# EAGLE board menzuke (EAGLE 8.6.0), part 1 of 2
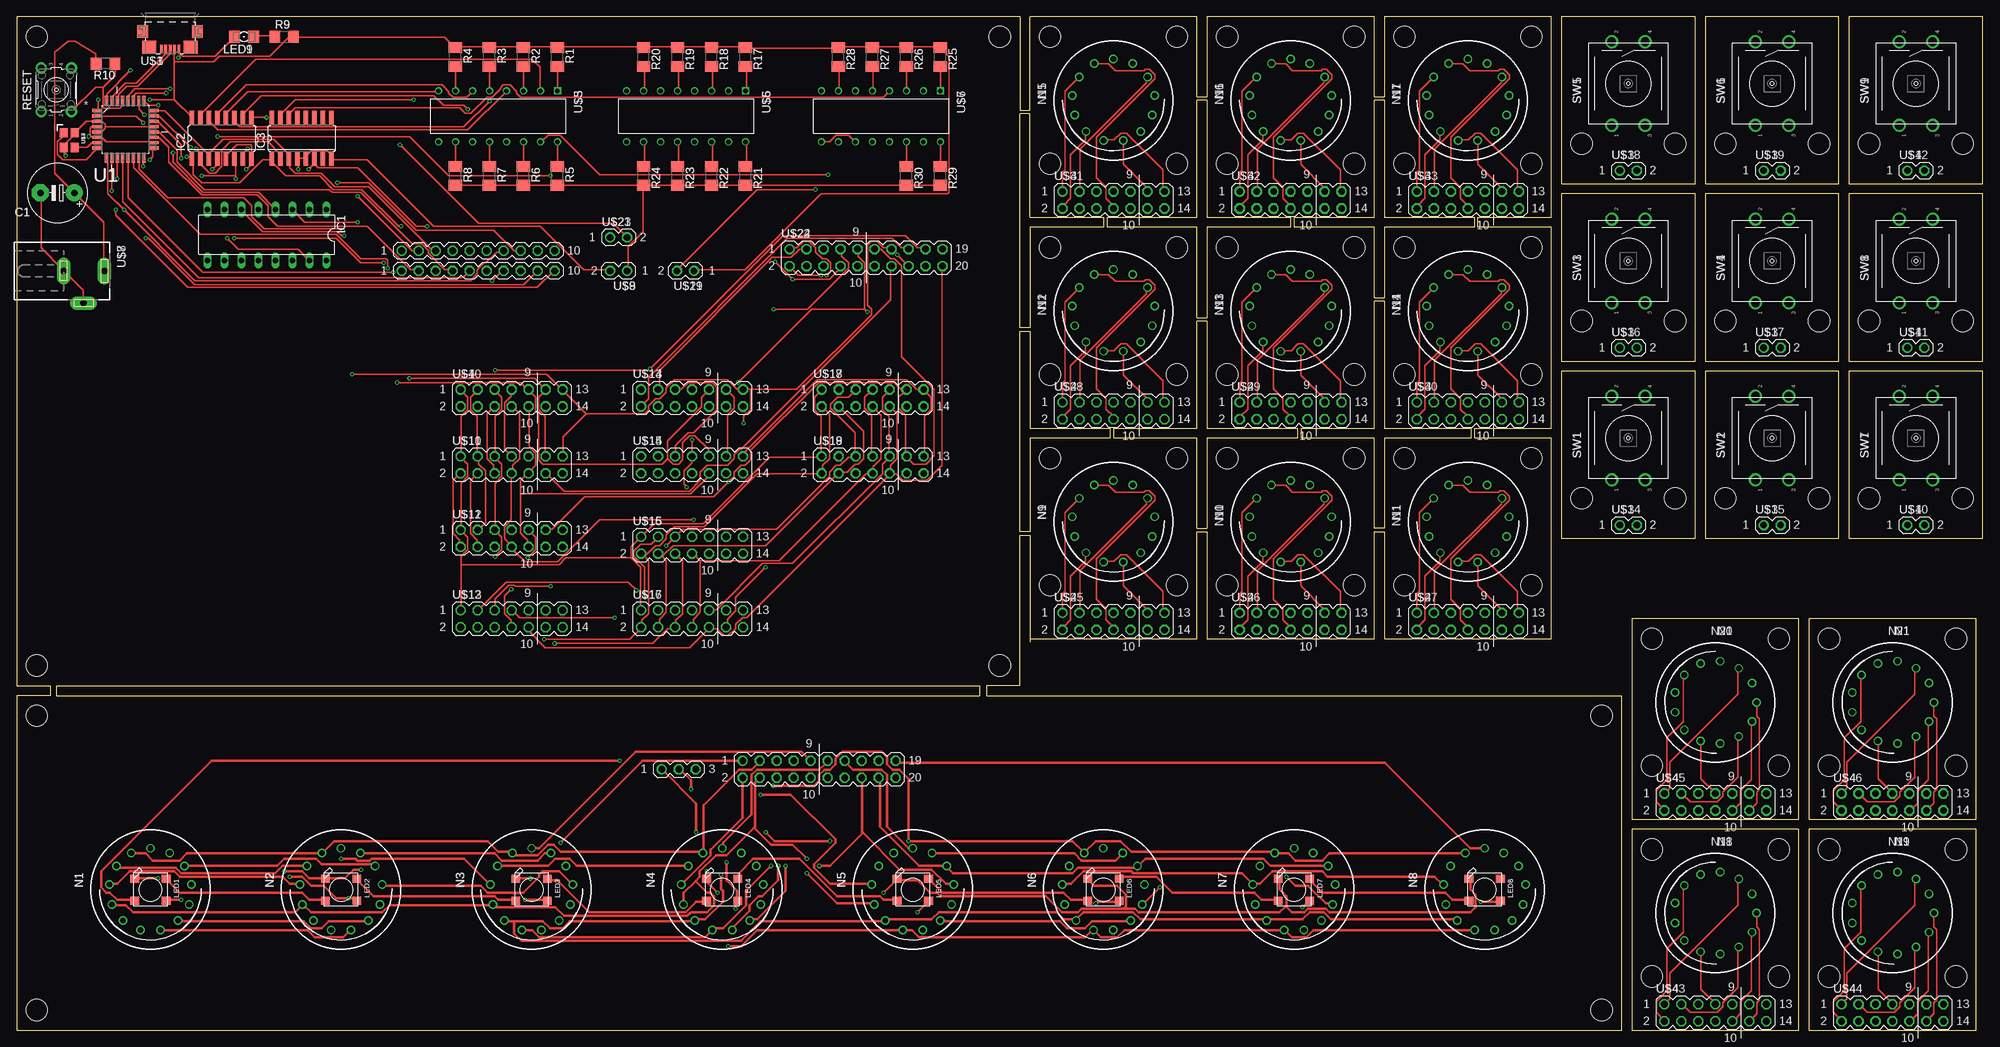
[diagram p0: board, top side]
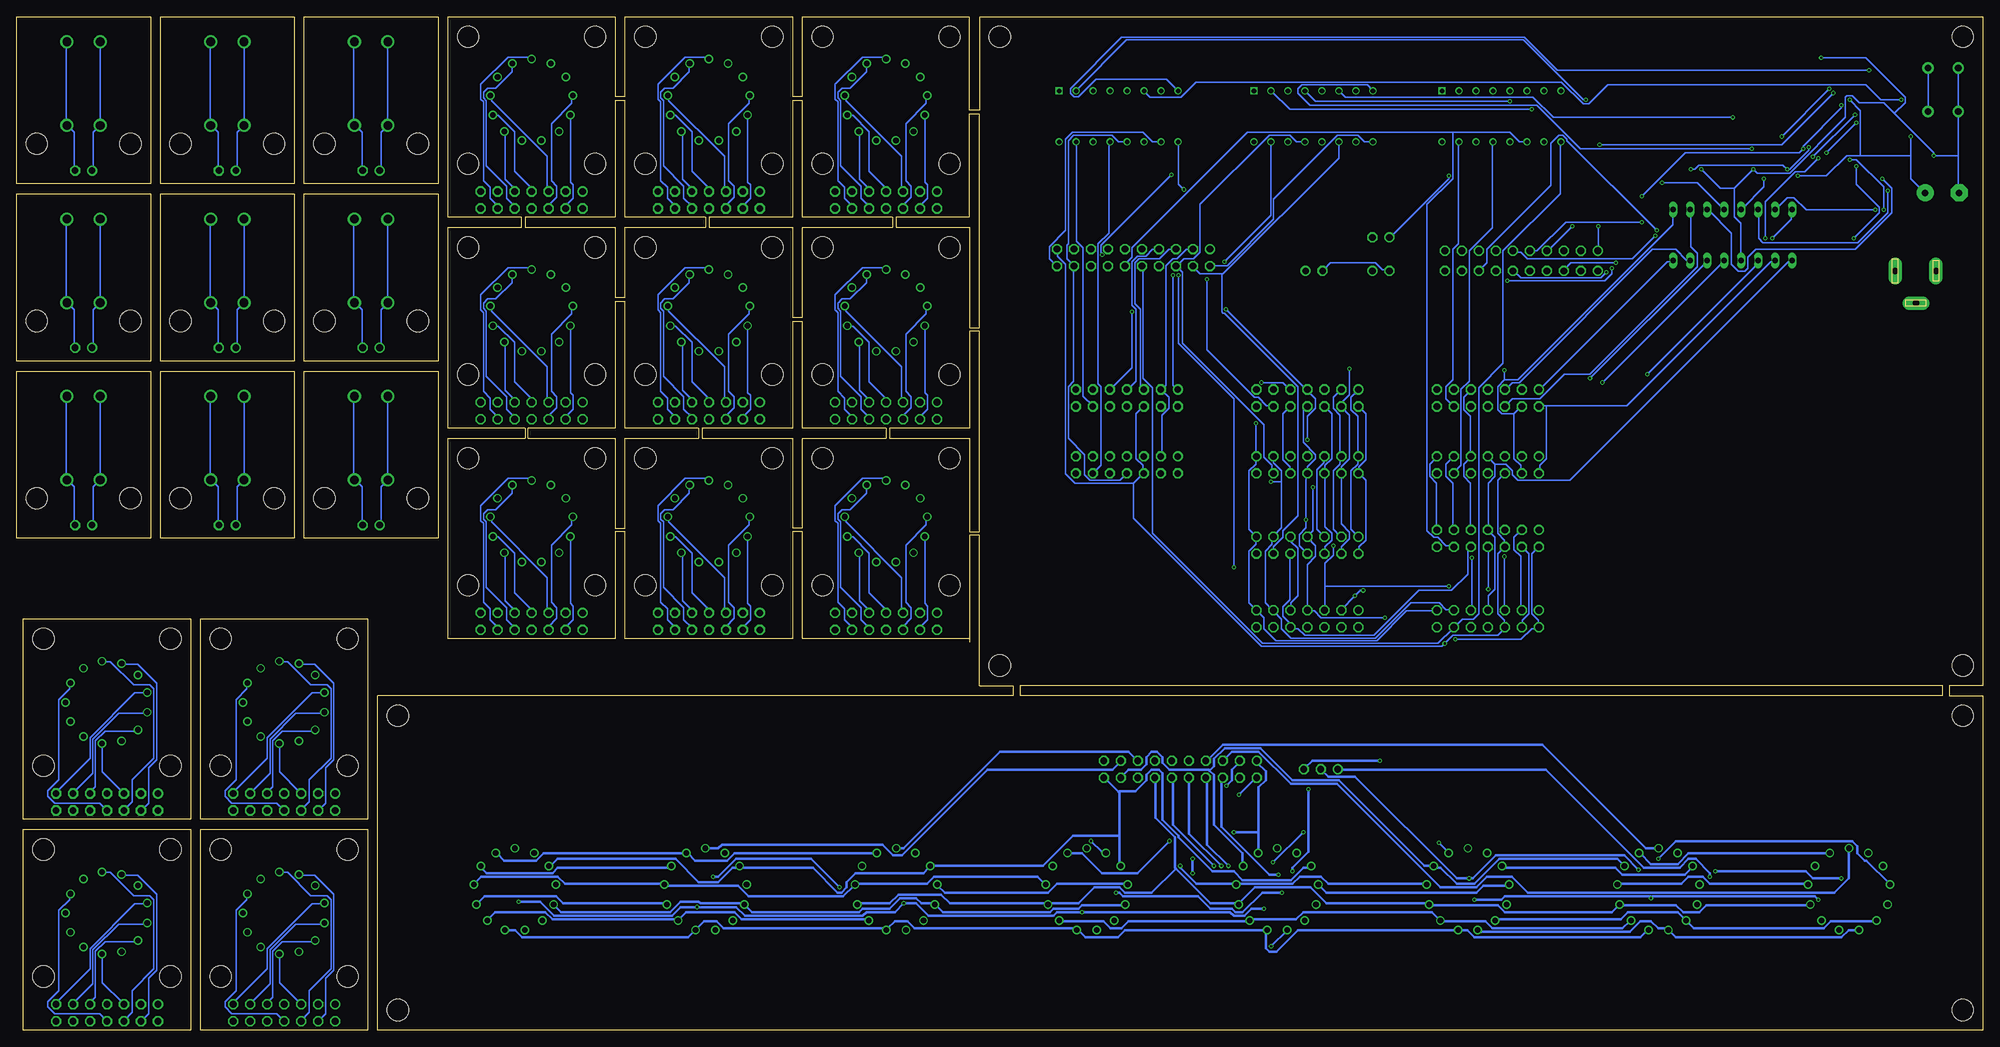
[diagram p1: board, bottom side, seen from below]

Size 294 x 151.5 mm. Coordinates in mm from the lower left corner, seen from the top.
Outline: 151.5,58.5 176.5,58.5 176.5,74.5 178,74.5 178,58.5 203,58.5 203,74.5 204.5,74.5 204.5,58.5 229.5,58.5 229.5,88.5 218,88.5 218,90 229.5,90 229.5,120 218.5,120 218.5,121.5 229.5,121.5 229.5,151.5 204.5,151.5 204.5,139.5 203,139.5 203,151.5 178,151.5 178,139.5 176.5,139.5 176.5,151.5 151.5,151.5 151.5,137.5 150,137.5 150,151.5 0,151.5 0,51.5 5,51.5 5,50 0,50 0,0 240,0 240,50 145,50 145,51.5 150,51.5 150,74 151.5,74 151.5,58
Outline: 176.5,75 176.5,88.5 164,88.5 164,90 176.5,90 176.5,106 178,106 178,90 191.5,90 191.5,88.5 178,88.5 178,75 176.5,75
Outline: 163.5,88.5 151.5,88.5 151.5,74.5 150,74.5 150,104.5 151.5,104.5 151.5,90 163.5,90 163.5,88.5
Outline: 203,75 203,88.5 192,88.5 192,90 203,90 203,109 204.5,109 204.5,90 217.5,90 217.5,88.5 204.5,88.5 204.5,75 203,75
Outline: 176.5,106.5 176.5,120 163,120 163,121.5 176.5,121.5 176.5,139 178,139 178,121.5 190.5,121.5 190.5,120 178,120 178,106.5 176.5,106.5
Outline: 162.5,120 151.5,120 151.5,105 150,105 150,137 151.5,137 151.5,121.5 162.5,121.5 162.5,120
Outline: 203,109.5 203,120 191,120 191,121.5 203,121.5 203,139 204.5,139 204.5,121.5 218,121.5 218,120 204.5,120 204.5,109.5 203,109.5
Outline: 231,73.5 251,73.5 251,98.5 231,98.5 231,73.5
Outline: 252.5,73.5 272.5,73.5 272.5,98.5 252.5,98.5 252.5,73.5
Outline: 231,100 251,100 251,125 231,125 231,100
Outline: 252.5,100 272.5,100 272.5,125 252.5,125 252.5,100
Outline: 231,126.5 251,126.5 251,151.5 231,151.5 231,126.5
Outline: 252.5,126.5 272.5,126.5 272.5,151.5 252.5,151.5 252.5,126.5
Outline: 274,73.5 294,73.5 294,98.5 274,98.5 274,73.5
Outline: 274,100 294,100 294,125 274,125 274,100
Outline: 274,126.5 294,126.5 294,151.5 274,151.5 274,126.5
Outline: 241.5,0 266.5,0 266.5,30 241.5,30 241.5,0
Outline: 268,0 293,0 293,30 268,30 268,0
Outline: 241.5,31.5 266.5,31.5 266.5,61.5 241.5,61.5 241.5,31.5
Outline: 268,31.5 293,31.5 293,61.5 268,61.5 268,31.5
Outline: 6,50 144,50 144,51.5 6,51.5 6,50
Copper layers (1*16): Top 0.035mm / dielectric 1.6mm / Bottom 0.035mm
Design rules "Elecrow_2-layer_PCB_eagle_rule": minimum track width 6mil, minimum drill 12mil, track to track 6mil, track to pad 8mil, pad to pad 12mil, via to via 12mil, smd to smd 0mil, copper to edge 20mil, drill to drill 10mil, minimum pad ring 6mil, minimum via ring 6mil, stop-mask expansion 0mil, vias tented up to drill 100mil, thermal gap 10mil
Net classes: 0 default: width 0.254 mm
Holes 3.2 mm at 3,47 3,3 237,47 237,3 154.5,85.5 173.5,85.5 173.5,66.5 154.5,66.5 181,85.5 200,85.5 200,66.5 181,66.5 207.5,85.5 226.5,85.5 226.5,66.5 207.5,66.5 154.5,117 173.5,117 173.5,98 154.5,98 181,117 200,117 200,98 181,98 207.5,117 226.5,117 226.5,98 207.5,98 154.5,148.5 173.5,148.5 173.5,129.5 154.5,129.5 181,148.5 200,148.5 200,129.5 181,129.5 207.5,148.5 226.5,148.5 226.5,129.5 207.5,129.5 248,79.5 234,79.5 269.5,79.5 255.5,79.5 248,106 234,106 269.5,106 255.5,106 248,132.5 234,132.5 269.5,132.5 255.5,132.5 291,79.5 277,79.5 291,106 277,106 291,132.5 277,132.5 244.5,27 263.5,27 263.5,8 244.5,8 271,27 290,27 290,8 271,8 244.5,58.5 263.5,58.5 263.5,39.5 244.5,39.5 271,58.5 290,58.5 290,39.5 271,39.5 147,148.5 147,54.5 3,54.5 3,148.5

## Footprints (pad centres in the part's own frame; a part is rotated, then mirrored left to right if it is on the bottom)
E5-8,5 = drill 1.016 pad 2.54: + -2.54,0 | drill 1.016 pad 2.54 octagon: - 2.54,0
DIL16 = drill 0.813 long: 1 -8.89,-3.81; 2 -6.35,-3.81; 3 -3.81,-3.81; 4 -1.27,-3.81; 5 1.27,-3.81; 6 3.81,-3.81; 7 6.35,-3.81; 8 8.89,-3.81; 9 8.89,3.81; 10 6.35,3.81; 11 3.81,3.81; 12 1.27,3.81; 13 -1.27,3.81; 14 -3.81,3.81; 15 -6.35,3.81; 16 -8.89,3.81
SO16 = smd 0.66 x 2.032: 1 -4.445,-3.073; 2 -3.175,-3.073; 3 -1.905,-3.073; 4 -0.635,-3.073; 5 0.635,-3.073; 6 1.905,-3.073; 7 3.175,-3.073; 8 4.445,-3.073; 9 4.445,3.073; 10 3.175,3.073; 11 1.905,3.073; 12 0.635,3.073; 13 -0.635,3.073; 14 -1.905,3.073; 15 -3.175,3.073; 16 -4.445,3.073
WS2812B-NARROW = smd 1.3 x 1.2: 1-VDD 2.35,-1.65; 2-DOUT 2.35,1.65; 3-GND -2.35,1.65; 4-DIN -2.35,-1.65
1206 = smd 1.6 x 1.803: A -1.422,0; C 1.422,0
IN-14 = drill 0.84: 0 5.094,-3.516; 1 -5.094,-3.516; 2 -6.145,-0.746; 3 -5.788,2.195; 4 -4.105,4.633; 5 -1.481,6.01; 6 1.481,6.01; 7 4.105,4.633; 8 5.788,2.195; 9 6.145,-0.746; A 0,-6.19; LHDP 2.877,-5.481; RHDP -2.877,-5.481
M3216 = smd 1.6 x 2: 1 -1.4,0; 2 1.4,0
R3216 = smd 1.6 x 1.8: 1 -1.4,0; 2 1.4,0
DTS6 = drill 1.016 pad 1.676: 1 -3.251,2.261; 2 3.251,2.261; 3 -3.251,-2.261; 4 3.251,-2.261
TVGP01-G73BB = drill 1.3: 1 -6.25,2.5; 2 6.25,2.5; 3 -6.25,-2.5; 4 6.25,-2.5
QFP80P900X900X120-32N = smd 1.473 x 0.508: 1 -4.242,2.794; 2 -4.242,2.007; 3 -4.242,1.194; 4 -4.242,0.406; 5 -4.242,-0.406; 6 -4.242,-1.194; 7 -4.242,-2.007; 8 -4.242,-2.794; 17 4.242,-2.794; 18 4.242,-2.007; 19 4.242,-1.194; 20 4.242,-0.406; 21 4.242,0.406; 22 4.242,1.194; 23 4.242,2.007; 24 4.242,2.794 | smd 0.508 x 1.473: 9 -2.794,-4.242; 10 -2.007,-4.242; 11 -1.194,-4.242; 12 -0.406,-4.242; 13 0.406,-4.242; 14 1.194,-4.242; 15 2.007,-4.242; 16 2.794,-4.242; 25 2.794,4.242; 26 2.007,4.242; 27 1.194,4.242; 28 0.406,4.242; 29 -0.406,4.242; 30 -1.194,4.242; 31 -2.007,4.242; 32 -2.794,4.242
PIN_HEADER_MALE_2X10_20P = drill 1: P$1 -11.43,1.27 | drill 1 octagon: P$2 -11.43,-1.27; P$3 -8.89,1.27; P$4 -8.89,-1.27; P$5 -6.35,1.27; P$6 -6.35,-1.27; P$7 -3.81,1.27; P$8 -3.81,-1.27; P$9 -1.27,1.27; P$10 -1.27,-1.27; P$11 1.27,1.27; P$12 1.27,-1.27; P$13 3.81,1.27; P$14 3.81,-1.27; P$15 6.35,1.27; P$16 6.35,-1.27; P$17 8.89,1.27; P$18 8.89,-1.27; P$19 11.43,1.27; P$20 11.43,-1.27
PIN_HEADER_MALE_1X03_03P = drill 1: P$1 -2.54,0 | drill 1 octagon: P$2 0,0; P$3 2.54,0
ZX62R-B-5P = smd 1.35 x 0.4: 1 2.675,-1.3; 2 2.675,-0.65; 3 2.675,0; 4 2.675,0.65; 5 2.675,1.3 | smd 1.9 x 1.6: M1 0,-4.1; M2 0,4.1 | smd 2 x 2.1: M3 2.35,3.1; M4 2.35,-3.1
FA-238 = smd 1.4 x 1.2: 1 0,-1.6; 2 2.2,-1.6; 3 2.2,0; 4 0,0
TLP627-4 = drill 0.7 square: P$1 0,0 | drill 0.7: P$2 0,-2.54; P$3 0,-5.08; P$4 0,-7.62; P$5 0,-10.16; P$6 0,-12.7; P$7 0,-15.24; P$8 0,-17.78; P$9 7.62,-17.78; P$10 7.62,-15.24; P$11 7.62,-12.7; P$12 7.62,-10.16; P$13 7.62,-7.62; P$14 7.62,-5.08; P$15 7.62,-2.54; P$16 7.62,0
DC_JACK_2DC0005D100 = drill 1 pad 2 long: 1 -3.1,0; 2 3,0; 3 0,4.8
PIN_HEADER_MALE_1X02_02P = drill 1: P$1 -1.27,0 | drill 1 octagon: P$2 1.27,0
PIN_HEADER_MALE_2X07_14P = drill 1: P$1 -7.62,1.27 | drill 1 octagon: P$2 -7.62,-1.27; P$3 -5.08,1.27; P$4 -5.08,-1.27; P$5 -2.54,1.27; P$6 -2.54,-1.27; P$7 0,1.27; P$8 0,-1.27; P$9 2.54,1.27; P$10 2.54,-1.27; P$11 5.08,1.27; P$12 5.08,-1.27; P$13 7.62,1.27; P$14 7.62,-1.27
PIN_HEADER_MALE_1X10_10P = drill 1: P$1 -11.43,0 | drill 1 octagon: P$2 -8.89,0; P$3 -6.35,0; P$4 -3.81,0; P$5 -1.27,0; P$6 1.27,0; P$7 3.81,0; P$8 6.35,0; P$9 8.89,0; P$10 11.43,0

## Placement (x,y rotation side)
C1  [E5-8,5]  6.09,125.15 180 top
IC1  74141N  [DIL16]  37.4,118.89 180 top
IC2  74HC138D  [SO16]  30.67,133.32 0 top
IC3  74HC138D  [SO16]  42.64,133.32 0 top
LED1  WS2812B_5050N  [WS2812B-NARROW]  20,21 0 top
LED2  WS2812B_5050N  [WS2812B-NARROW]  48.5,21 0 top
LED3  WS2812B_5050N  [WS2812B-NARROW]  77,21 0 top
LED4  WS2812B_5050N  [WS2812B-NARROW]  105.5,21 0 top
LED5  WS2812B_5050N  [WS2812B-NARROW]  134,21 0 top
LED6  WS2812B_5050N  [WS2812B-NARROW]  162.5,21 0 top
LED7  WS2812B_5050N  [WS2812B-NARROW]  191,21 0 top
LED8  WS2812B_5050N  [WS2812B-NARROW]  219.5,21 0 top
LED9  [1206]  34,148.5 180 top
N1  IN-14  [IN-14]  20,21 180 top
N2  IN-14  [IN-14]  48.5,21 180 top
N3  IN-14  [IN-14]  77,21 180 top
N4  IN-14  [IN-14]  105.5,21 180 top
N5  IN-14  [IN-14]  134,21 180 top
N6  IN-14  [IN-14]  162.5,21 180 top
N7  IN-14  [IN-14]  191,21 180 top
N8  IN-14  [IN-14]  219.5,21 180 top
N9  IN-14  [IN-14]  164,76 180 top
N10  IN-14  [IN-14]  190.5,76 180 top
N11  IN-14  [IN-14]  217,76 180 top
N12  IN-14  [IN-14]  164,107.5 180 top
N13  IN-14  [IN-14]  190.5,107.5 180 top
N14  IN-14  [IN-14]  217,107.5 180 top
N15  IN-14  [IN-14]  164,139 180 top
N16  IN-14  [IN-14]  190.5,139 180 top
N17  IN-14  [IN-14]  217,139 180 top
N18  IN-14  [IN-14]  254,17.5 90 top
N19  IN-14  [IN-14]  280.5,17.5 90 top
N20  IN-14  [IN-14]  254,49 90 top
N21  IN-14  [IN-14]  280.5,49 90 top
R1  [M3216]  80.85,145.48 270 top
R2  [M3216]  75.77,145.48 270 top
R3  [M3216]  70.69,145.48 270 top
R4  [M3216]  65.61,145.48 270 top
R5  [M3216]  80.85,127.7 270 top
R6  [M3216]  75.77,127.7 270 top
R7  [M3216]  70.69,127.7 270 top
R8  [M3216]  65.61,127.7 270 top
R9  [R3216]  40,148.5 0 top
R10  [R3216]  13.3,144.49 180 top
R17  [M3216]  108.98,145.48 270 top
R18  [M3216]  103.9,145.48 270 top
R19  [M3216]  98.82,145.48 270 top
R20  [M3216]  93.74,145.48 270 top
R21  [M3216]  108.98,127.7 270 top
R22  [M3216]  103.9,127.7 270 top
R23  [M3216]  98.82,127.7 270 top
R24  [M3216]  93.74,127.7 270 top
R25  [M3216]  138.11,145.48 270 top
R26  [M3216]  133.03,145.48 270 top
R27  [M3216]  127.95,145.48 270 top
R28  [M3216]  122.87,145.48 270 top
R29  [M3216]  138.11,127.7 270 top
R30  [M3216]  133.03,127.7 270 top
RESET  DTS-6  [DTS6]  5.92,140.59 90 top
SW1  TVGP01-G73BB  [TVGP01-G73BB]  241,88.5 90 top
SW2  TVGP01-G73BB  [TVGP01-G73BB]  262.5,88.5 90 top
SW3  TVGP01-G73BB  [TVGP01-G73BB]  241,115 90 top
SW4  TVGP01-G73BB  [TVGP01-G73BB]  262.5,115 90 top
SW5  TVGP01-G73BB  [TVGP01-G73BB]  241,141.5 90 top
SW6  TVGP01-G73BB  [TVGP01-G73BB]  262.5,141.5 90 top
SW7  TVGP01-G73BB  [TVGP01-G73BB]  284,88.5 90 top
SW8  TVGP01-G73BB  [TVGP01-G73BB]  284,115 90 top
SW9  TVGP01-G73BB  [TVGP01-G73BB]  284,141.5 90 top
U1  ATMEGA328P-AU  [QFP80P900X900X120-32N]  16.24,134.67 0 top
U$1  PIN_HEADER_MALE_2X10_20P  [PIN_HEADER_MALE_2X10_20P]  120,39 0 top
U$2  PIN_HEADER_MALE_1X03_03P  [PIN_HEADER_MALE_1X03_03P]  99,39 0 top
U$3  MICRO-USB-ZX62R-B-5P  [ZX62R-B-5P]  22.94,149.29 270 top
U$4  FA-238  [FA-238]  8.65,134.16 270 top
U$5  TLP627-4  [TLP627-4]  80.85,140.4 270 top
U$6  TLP627-4  [TLP627-4]  108.98,140.4 270 top
U$7  TLP627-4  [TLP627-4]  138.11,140.4 270 top
U$8  DC_JACK_2DC0005D100  [DC_JACK_2DC0005D100]  10,113.5 180 top
U$9  PIN_HEADER_MALE_1X02_02P  [PIN_HEADER_MALE_1X02_02P]  90,113.5 180 top
U$10  PIN_HEADER_MALE_2X07_14P  [PIN_HEADER_MALE_2X07_14P]  74,94.5 0 top
U$11  PIN_HEADER_MALE_2X07_14P  [PIN_HEADER_MALE_2X07_14P]  74,84.5 0 top
U$12  PIN_HEADER_MALE_2X07_14P  [PIN_HEADER_MALE_2X07_14P]  74,73.5 0 top
U$13  PIN_HEADER_MALE_2X07_14P  [PIN_HEADER_MALE_2X07_14P]  74,61.5 0 top
U$14  PIN_HEADER_MALE_2X07_14P  [PIN_HEADER_MALE_2X07_14P]  101,94.5 0 top
U$15  PIN_HEADER_MALE_2X07_14P  [PIN_HEADER_MALE_2X07_14P]  101,84.5 0 top
U$16  PIN_HEADER_MALE_2X07_14P  [PIN_HEADER_MALE_2X07_14P]  101,72.5 0 top
U$17  PIN_HEADER_MALE_2X07_14P  [PIN_HEADER_MALE_2X07_14P]  101,61.5 0 top
U$18  PIN_HEADER_MALE_2X07_14P  [PIN_HEADER_MALE_2X07_14P]  128,94.5 0 top
U$19  PIN_HEADER_MALE_2X07_14P  [PIN_HEADER_MALE_2X07_14P]  128,84.5 0 top
U$20  PIN_HEADER_MALE_1X10_10P  [PIN_HEADER_MALE_1X10_10P]  69,116.5 0 top
U$21  PIN_HEADER_MALE_1X02_02P  [PIN_HEADER_MALE_1X02_02P]  100,113.5 180 top
U$22  PIN_HEADER_MALE_1X10_10P  [PIN_HEADER_MALE_1X10_10P]  69,113.5 0 top
U$23  PIN_HEADER_MALE_1X02_02P  [PIN_HEADER_MALE_1X02_02P]  90,118.5 0 top
U$24  PIN_HEADER_MALE_2X10_20P  [PIN_HEADER_MALE_2X10_20P]  127,115.5 0 top
U$25  PIN_HEADER_MALE_2X07_14P  [PIN_HEADER_MALE_2X07_14P]  164,61.1 0 top
U$26  PIN_HEADER_MALE_2X07_14P  [PIN_HEADER_MALE_2X07_14P]  190.5,61.1 0 top
U$27  PIN_HEADER_MALE_2X07_14P  [PIN_HEADER_MALE_2X07_14P]  217,61.1 0 top
U$28  PIN_HEADER_MALE_2X07_14P  [PIN_HEADER_MALE_2X07_14P]  164,92.6 0 top
U$29  PIN_HEADER_MALE_2X07_14P  [PIN_HEADER_MALE_2X07_14P]  190.5,92.6 0 top
U$30  PIN_HEADER_MALE_2X07_14P  [PIN_HEADER_MALE_2X07_14P]  217,92.6 0 top
U$31  PIN_HEADER_MALE_2X07_14P  [PIN_HEADER_MALE_2X07_14P]  164,124.1 0 top
U$32  PIN_HEADER_MALE_2X07_14P  [PIN_HEADER_MALE_2X07_14P]  190.5,124.1 0 top
U$33  PIN_HEADER_MALE_2X07_14P  [PIN_HEADER_MALE_2X07_14P]  217,124.1 0 top
U$34  PIN_HEADER_MALE_1X02_02P  [PIN_HEADER_MALE_1X02_02P]  241,75.5 0 top
U$35  PIN_HEADER_MALE_1X02_02P  [PIN_HEADER_MALE_1X02_02P]  262.5,75.5 0 top
U$36  PIN_HEADER_MALE_1X02_02P  [PIN_HEADER_MALE_1X02_02P]  241,102 0 top
U$37  PIN_HEADER_MALE_1X02_02P  [PIN_HEADER_MALE_1X02_02P]  262.5,102 0 top
U$38  PIN_HEADER_MALE_1X02_02P  [PIN_HEADER_MALE_1X02_02P]  241,128.5 0 top
U$39  PIN_HEADER_MALE_1X02_02P  [PIN_HEADER_MALE_1X02_02P]  262.5,128.5 0 top
U$40  PIN_HEADER_MALE_1X02_02P  [PIN_HEADER_MALE_1X02_02P]  284,75.5 0 top
U$41  PIN_HEADER_MALE_1X02_02P  [PIN_HEADER_MALE_1X02_02P]  284,102 0 top
U$42  PIN_HEADER_MALE_1X02_02P  [PIN_HEADER_MALE_1X02_02P]  284,128.5 0 top
U$43  PIN_HEADER_MALE_2X07_14P  [PIN_HEADER_MALE_2X07_14P]  254,2.6 0 top
U$44  PIN_HEADER_MALE_2X07_14P  [PIN_HEADER_MALE_2X07_14P]  280.5,2.6 0 top
U$45  PIN_HEADER_MALE_2X07_14P  [PIN_HEADER_MALE_2X07_14P]  254,34.1 0 top
U$46  PIN_HEADER_MALE_2X07_14P  [PIN_HEADER_MALE_2X07_14P]  280.5,34.1 0 top

## Library data of the parts
C1 LED9 R9 R10 RESET U$1 U$2 U$5-U$33 U$43-U$46 = 160713 Library by matsu
IC1-IC3 = 74xx-eu
LED1-LED8 = adafruit
N1-N21 = russian-nixies
R1-R8 R17-R30 = resistor
SW1-SW9 = new
U1 = Atmel-ATMEGA328P-AU; DESCRIPTION: 8-bit Microcontroller with In-System Programmable Flash; MPN: ATMEGA328P-AU; OC_FARNELL: 1715486; OC_NEWARK: 14R4631; PACKAGE: TQFP-32; SUPPLIER: Atmel
U$3 = con-hirose
U$4 = crystals
U$34-U$42 = 180118 Library by matsu

## Nets
200V: R5.2 R6.2 R7.2 R8.2 R21.2 R22.2 R23.2 R24.2 R29.2 R30.2 U$9.P$1
+5V: LED1.1-VDD LED2.1-VDD LED3.1-VDD LED4.1-VDD LED5.1-VDD LED6.1-VDD LED7.1-VDD LED8.1-VDD U$2.P$1
+5V1: C1.+ IC1.5 IC2.6 IC2.16 R1.1 R2.1 R3.1 R4.1 R9.2 R10.2 R17.1 R18.1 R19.1 R20.1 R25.1 R26.1 R27.1 R28.1 U1.4 U1.6 U1.18 U$3.4 U$8.1 U$21.P$1
ANODE0: IC2.15 U$5.P$2
ANODE1: IC2.14 U$5.P$4
ANODE2: IC2.13 U$5.P$6
ANODE3: IC2.12 U$5.P$8
ANODE4: IC2.10 U$6.P$2
ANODE5: IC2.11 U$6.P$4
ANODE6: IC2.9 U$6.P$6
ANODE7: IC2.7 U$6.P$8
ANODE8: IC3.15 U$7.P$2
ANODE9: IC3.14 U$7.P$4
ANODE10: IC3.13
ANODE11: IC3.12
ANODE12: IC3.11
ANODE13: IC3.10
ANODE14: IC3.9
ANODE15: IC3.7
DOT0: N1.LHDP N2.LHDP N3.LHDP N4.LHDP N5.LHDP N6.LHDP N7.LHDP N8.LHDP U$1.P$3
DOT1: N1.RHDP N2.RHDP N3.RHDP N4.RHDP N5.RHDP N6.RHDP N7.RHDP N8.RHDP U$1.P$1
DOT2: U$7.P$12 U$10.P$8 U$11.P$8 U$12.P$8 U$13.P$8 U$14.P$8 U$15.P$8 U$16.P$8 U$17.P$8 U$18.P$8 U$19.P$8 U$24.P$18
DOT3: U$7.P$10 U$10.P$10 U$11.P$10 U$12.P$10 U$13.P$10 U$14.P$10 U$15.P$10 U$16.P$10 U$17.P$10 U$18.P$10 U$19.P$10 U$24.P$20
DTR: U$3.1
GND: LED1.3-GND LED2.3-GND LED3.3-GND LED4.3-GND LED5.3-GND LED6.3-GND LED7.3-GND LED8.3-GND U$2.P$2
GND1: C1.- IC1.12 IC2.5 IC2.8 IC3.4 IC3.5 IC3.8 LED9.C RESET.1 RESET.2 U1.3 U1.5 U1.21 U$3.5 U$4.2 U$4.4 U$7.P$9 U$7.P$11 U$8.2 U$8.3 U$9.P$2 U$21.P$2
LHDP: U1.1 U$7.P$6
N$1: LED1.2-DOUT LED2.4-DIN
N$2: LED2.2-DOUT LED3.4-DIN
N$3: LED3.2-DOUT LED4.4-DIN
N$4: LED4.2-DOUT LED5.4-DIN
N$5: LED5.2-DOUT LED6.4-DIN
N$6: LED6.2-DOUT LED7.4-DIN
N$7: LED7.2-DOUT LED8.4-DIN
N$8: LED1.4-DIN U$2.P$3
N$9: U1.7 U$4.3
N$10: U1.8 U$4.1
N$11: IC1.3 U1.11 U$20.P$5
N$12: IC1.6 U1.10 U$20.P$6
N$13: IC1.7 U1.9 U$20.P$7
N$14: IC1.4 U1.2 U$20.P$8
N$15: R1.2 U$5.P$1
N$16: R2.2 U$5.P$3
N$17: R3.2 U$5.P$5
N$18: R4.2 U$5.P$7
N$19: R8.1 U$5.P$10
N$20: R7.1 U$5.P$12
N$21: R6.1 U$5.P$14
N$22: R5.1 U$5.P$16
N$23: R17.2 U$6.P$1
N$24: R18.2 U$6.P$3
N$25: R19.2 U$6.P$5
N$26: R20.2 U$6.P$7
N$27: R24.1 U$6.P$10
N$28: R23.1 U$6.P$12
N$29: R22.1 U$6.P$14
N$30: R21.1 U$6.P$16
N$31: R25.2 U$7.P$1
N$32: R26.2 U$7.P$3
N$33: R27.2 U$7.P$5
N$34: R28.2 U$7.P$7
N$35: R10.1 RESET.3 RESET.4 U1.29
N$36: LED9.A R9.1
N$37: R30.1 U$7.P$14
N$38: R29.1 U$7.P$16
N$39: U1.17 U$22.P$10
N$40: U1.16 U$22.P$9
N$41: U1.15 U$22.P$8
N$42: U1.14 U$22.P$7
N$43: U1.13 U$22.P$6
N$44: U1.12 U$22.P$5
N$45: U1.20 U$22.P$4
N$46: U1.22 U$22.P$3
N$47: U1.19 U$22.P$2
N$48: U1.28 U$23.P$1
N$49: U1.27 U$23.P$2
N$50: N9.A U$25.P$12
N$51: N9.LHDP U$25.P$8
N$52: N9.RHDP U$25.P$10
N$53: N10.A U$26.P$12
N$54: N10.LHDP U$26.P$8
N$55: N10.RHDP U$26.P$10
N$56: N11.A U$27.P$12
N$57: N11.LHDP U$27.P$8
N$58: N11.RHDP U$27.P$10
N$59: N12.A U$28.P$12
N$60: N12.LHDP U$28.P$8
N$61: N12.RHDP U$28.P$10
N$62: N13.A U$29.P$12
N$63: N13.LHDP U$29.P$8
N$64: N13.RHDP U$29.P$10
N$65: N14.A U$30.P$12
N$66: N14.LHDP U$30.P$8
N$67: N14.RHDP U$30.P$10
N$68: N15.A U$31.P$12
N$69: N15.LHDP U$31.P$8
N$70: N15.RHDP U$31.P$10
N$71: N16.A U$32.P$12
N$72: N16.LHDP U$32.P$8
N$73: N16.RHDP U$32.P$10
N$74: N17.A U$33.P$12
N$75: N17.LHDP U$33.P$8
N$76: N17.RHDP U$33.P$10
N$77: SW1.1 SW1.2 U$34.P$1
N$78: SW1.3 SW1.4 U$34.P$2
N$79: SW2.1 SW2.2 U$35.P$1
N$80: SW2.3 SW2.4 U$35.P$2
N$81: SW3.1 SW3.2 U$36.P$1
N$82: SW3.3 SW3.4 U$36.P$2
N$83: SW4.1 SW4.2 U$37.P$1
N$84: SW4.3 SW4.4 U$37.P$2
N$85: SW5.1 SW5.2 U$38.P$1
N$86: SW5.3 SW5.4 U$38.P$2
N$87: SW6.1 SW6.2 U$39.P$1
N$88: SW6.3 SW6.4 U$39.P$2
N$89: SW7.1 SW7.2 U$40.P$1
N$90: SW7.3 SW7.4 U$40.P$2
N$91: SW8.1 SW8.2 U$41.P$1
N$92: SW8.3 SW8.4 U$41.P$2
N$93: SW9.1 SW9.2 U$42.P$1
N$94: SW9.3 SW9.4 U$42.P$2
N$95: N18.A U$43.P$12
N$96: N18.LHDP U$43.P$8
N$97: N18.RHDP U$43.P$10
N$98: N19.A U$44.P$12
N$99: N19.LHDP U$44.P$8
N$100: N19.RHDP U$44.P$10
N$101: N20.A U$45.P$12
N$102: N20.LHDP U$45.P$8
N$103: N20.RHDP U$45.P$10
N$104: N21.A U$46.P$12
N$105: N21.LHDP U$46.P$8
N$106: N21.RHDP U$46.P$10
NIX1: IC2.1 IC3.1 U1.26 U$20.P$1
NIX2: IC2.2 IC3.2 U1.25 U$20.P$2
NIX3: IC2.3 IC3.3 U1.24 U$20.P$3
NIX4: IC2.4 IC3.6 U1.23 U$20.P$4
NIXIE0: N1.0 N2.0 N3.0 N4.0 N5.0 N6.0 N7.0 N8.0 U$1.P$20
NIXIE1: N1.1 N2.1 N3.1 N4.1 N5.1 N6.1 N7.1 N8.1 U$1.P$18
NIXIE2: N1.2 N2.2 N3.2 N4.2 N5.2 N6.2 N7.2 N8.2 U$1.P$16
NIXIE3: N1.3 N2.3 N3.3 N4.3 N5.3 N6.3 N7.3 N8.3 U$1.P$14
NIXIE4: N1.4 N2.4 N3.4 N4.4 N5.4 N6.4 N7.4 N8.4 U$1.P$12
NIXIE5: N1.5 N2.5 N3.5 N4.5 N5.5 N6.5 N7.5 N8.5 U$1.P$10
NIXIE6: N1.6 N2.6 N3.6 N4.6 N5.6 N6.6 N7.6 N8.6 U$1.P$8
NIXIE7: N1.7 N2.7 N3.7 N4.7 N5.7 N6.7 N7.7 N8.7 U$1.P$6
NIXIE8: N1.8 N2.8 N3.8 N4.8 N5.8 N6.8 N7.8 N8.8 U$1.P$4
NIXIE9: N1.9 N2.9 N3.9 N4.9 N5.9 N6.9 N7.9 N8.9 U$1.P$2
NIXIE10: IC1.2 U$10.P$6 U$11.P$6 U$12.P$6 U$13.P$6 U$14.P$6 U$15.P$6 U$16.P$6 U$17.P$6 U$18.P$6 U$19.P$6 U$24.P$19
NIXIE11: IC1.1 U$10.P$4 U$11.P$4 U$12.P$4 U$13.P$4 U$14.P$4 U$15.P$4 U$16.P$4 U$17.P$4 U$18.P$4 U$19.P$4 U$24.P$17
NIXIE12: IC1.10 U$10.P$2 U$11.P$2 U$12.P$2 U$13.P$2 U$14.P$2 U$15.P$2 U$16.P$2 U$17.P$2 U$18.P$2 U$19.P$2 U$24.P$15
NIXIE13: IC1.11 U$10.P$13 U$11.P$13 U$12.P$13 U$13.P$13 U$14.P$13 U$15.P$13 U$16.P$13 U$17.P$13 U$18.P$13 U$19.P$13 U$24.P$13
NIXIE14: IC1.14 U$10.P$11 U$11.P$11 U$12.P$11 U$13.P$11 U$14.P$11 U$15.P$11 U$16.P$11 U$17.P$11 U$18.P$11 U$19.P$11 U$24.P$11
NIXIE15: IC1.13 U$10.P$9 U$11.P$9 U$12.P$9 U$13.P$9 U$14.P$9 U$15.P$9 U$16.P$9 U$17.P$9 U$18.P$9 U$19.P$9 U$24.P$9
NIXIE16: IC1.9 U$10.P$7 U$11.P$7 U$12.P$7 U$13.P$7 U$14.P$7 U$15.P$7 U$16.P$7 U$17.P$7 U$18.P$7 U$19.P$7 U$24.P$7
NIXIE17: IC1.8 IC1.15 U$10.P$5 U$11.P$5 U$12.P$5 U$13.P$5 U$14.P$5 U$15.P$5 U$16.P$5 U$17.P$5 U$18.P$5 U$19.P$5 U$24.P$5
NIXIE18: IC1.16 U$10.P$1 U$11.P$1 U$12.P$1 U$13.P$1 U$14.P$1 U$15.P$1 U$16.P$1 U$17.P$1 U$18.P$1 U$19.P$1 U$24.P$1
NIXIE19: U$10.P$3 U$11.P$3 U$12.P$3 U$13.P$3 U$14.P$3 U$15.P$3 U$16.P$3 U$17.P$3 U$18.P$3 U$19.P$3 U$24.P$3
NIXIE20: N9.0 U$25.P$1
NIXIE21: N9.1 U$25.P$3
NIXIE22: N9.2 U$25.P$5
NIXIE23: N9.3 U$25.P$7
NIXIE24: N9.4 U$25.P$9
NIXIE25: N9.5 U$25.P$11
NIXIE26: N9.6 U$25.P$13
NIXIE27: N9.7 U$25.P$2
NIXIE28: N9.8 U$25.P$4
NIXIE29: N9.9 U$25.P$6
NIXIE30: N10.0 U$26.P$1
NIXIE31: N10.1 U$26.P$3
NIXIE32: N10.2 U$26.P$5
NIXIE33: N10.3 U$26.P$7
NIXIE34: N10.4 U$26.P$9
NIXIE35: N10.5 U$26.P$11
NIXIE36: N10.6 U$26.P$13
NIXIE37: N10.7 U$26.P$2
NIXIE38: N10.8 U$26.P$4
NIXIE39: N10.9 U$26.P$6
NIXIE40: N11.0 U$27.P$1
NIXIE41: N11.1 U$27.P$3
NIXIE42: N11.2 U$27.P$5
NIXIE43: N11.3 U$27.P$7
NIXIE44: N11.4 U$27.P$9
NIXIE45: N11.5 U$27.P$11
NIXIE46: N11.6 U$27.P$13
NIXIE47: N11.7 U$27.P$2
NIXIE48: N11.8 U$27.P$4
NIXIE49: N11.9 U$27.P$6
NIXIE50: N12.0 U$28.P$1
NIXIE51: N12.1 U$28.P$3
NIXIE52: N12.2 U$28.P$5
NIXIE53: N12.3 U$28.P$7
NIXIE54: N12.4 U$28.P$9
NIXIE55: N12.5 U$28.P$11
NIXIE56: N12.6 U$28.P$13
NIXIE57: N12.7 U$28.P$2
NIXIE58: N12.8 U$28.P$4
NIXIE59: N12.9 U$28.P$6
NIXIE60: N13.0 U$29.P$1
NIXIE61: N13.1 U$29.P$3
NIXIE62: N13.2 U$29.P$5
NIXIE63: N13.3 U$29.P$7
NIXIE64: N13.4 U$29.P$9
NIXIE65: N13.5 U$29.P$11
NIXIE66: N13.6 U$29.P$13
NIXIE67: N13.7 U$29.P$2
NIXIE68: N13.8 U$29.P$4
NIXIE69: N13.9 U$29.P$6
NIXIE70: N14.0 U$30.P$1
NIXIE71: N14.1 U$30.P$3
NIXIE72: N14.2 U$30.P$5
NIXIE73: N14.3 U$30.P$7
NIXIE74: N14.4 U$30.P$9
NIXIE75: N14.5 U$30.P$11
NIXIE76: N14.6 U$30.P$13
NIXIE77: N14.7 U$30.P$2
NIXIE78: N14.8 U$30.P$4
NIXIE79: N14.9 U$30.P$6
NIXIE80: N15.0 U$31.P$1
NIXIE81: N15.1 U$31.P$3
NIXIE82: N15.2 U$31.P$5
NIXIE83: N15.3 U$31.P$7
NIXIE84: N15.4 U$31.P$9
NIXIE85: N15.5 U$31.P$11
NIXIE86: N15.6 U$31.P$13
NIXIE87: N15.7 U$31.P$2
NIXIE88: N15.8 U$31.P$4
NIXIE89: N15.9 U$31.P$6
NIXIE90: N16.0 U$32.P$1
NIXIE91: N16.1 U$32.P$3
NIXIE92: N16.2 U$32.P$5
NIXIE93: N16.3 U$32.P$7
NIXIE94: N16.4 U$32.P$9
NIXIE95: N16.5 U$32.P$11
NIXIE96: N16.6 U$32.P$13
NIXIE97: N16.7 U$32.P$2
NIXIE98: N16.8 U$32.P$4
NIXIE99: N16.9 U$32.P$6
NIXIE100: N17.0 U$33.P$1
NIXIE101: N17.1 U$33.P$3
NIXIE102: N17.2 U$33.P$5
NIXIE103: N17.3 U$33.P$7
NIXIE104: N17.4 U$33.P$9
NIXIE105: N17.5 U$33.P$11
NIXIE106: N17.6 U$33.P$13
NIXIE107: N17.7 U$33.P$2
NIXIE108: N17.8 U$33.P$4
NIXIE109: N17.9 U$33.P$6
NIXIE110: N18.0 U$43.P$1
NIXIE111: N18.1 U$43.P$3
NIXIE112: N18.2 U$43.P$5
NIXIE113: N18.3 U$43.P$7
NIXIE114: N18.4 U$43.P$9
NIXIE115: N18.5 U$43.P$11
NIXIE116: N18.6 U$43.P$13
NIXIE117: N18.7 U$43.P$2
NIXIE118: N18.8 U$43.P$4
NIXIE119: N18.9 U$43.P$6
NIXIE120: N19.0 U$44.P$1
NIXIE121: N19.1 U$44.P$3
NIXIE122: N19.2 U$44.P$5
NIXIE123: N19.3 U$44.P$7
NIXIE124: N19.4 U$44.P$9
NIXIE125: N19.5 U$44.P$11
NIXIE126: N19.6 U$44.P$13
NIXIE127: N19.7 U$44.P$2
NIXIE128: N19.8 U$44.P$4
NIXIE129: N19.9 U$44.P$6
NIXIE130: N20.0 U$45.P$1
NIXIE131: N20.1 U$45.P$3
NIXIE132: N20.2 U$45.P$5
NIXIE133: N20.3 U$45.P$7
NIXIE134: N20.4 U$45.P$9
NIXIE135: N20.5 U$45.P$11
NIXIE136: N20.6 U$45.P$13
NIXIE137: N20.7 U$45.P$2
NIXIE138: N20.8 U$45.P$4
NIXIE139: N20.9 U$45.P$6
NIXIE140: N21.0 U$46.P$1
NIXIE141: N21.1 U$46.P$3
NIXIE142: N21.2 U$46.P$5
NIXIE143: N21.3 U$46.P$7
NIXIE144: N21.4 U$46.P$9
NIXIE145: N21.5 U$46.P$11
NIXIE146: N21.6 U$46.P$13
NIXIE147: N21.7 U$46.P$2
NIXIE148: N21.8 U$46.P$4
NIXIE149: N21.9 U$46.P$6
NIXIE_ANODE1: N1.A U$1.P$5
NIXIE_ANODE2: N2.A U$1.P$7
NIXIE_ANODE3: N3.A U$1.P$9
NIXIE_ANODE4: N4.A U$1.P$11
NIXIE_ANODE5: N5.A U$1.P$13
NIXIE_ANODE6: N6.A U$1.P$15
NIXIE_ANODE7: N7.A U$1.P$17
NIXIE_ANODE8: N8.A U$1.P$19
NIXIE_ANODE9: U$5.P$15 U$10.P$12 U$24.P$16
NIXIE_ANODE10: U$5.P$13 U$11.P$12 U$24.P$14
NIXIE_ANODE11: U$5.P$11 U$12.P$12 U$24.P$12
NIXIE_ANODE12: U$5.P$9 U$13.P$12 U$24.P$10
NIXIE_ANODE13: U$6.P$15 U$14.P$12 U$24.P$8
NIXIE_ANODE14: U$6.P$13 U$15.P$12 U$24.P$6
NIXIE_ANODE15: U$6.P$11 U$16.P$12 U$24.P$4
NIXIE_ANODE16: U$6.P$9 U$17.P$12 U$24.P$2
NIXIE_ANODE17: U$7.P$15 U$18.P$12
NIXIE_ANODE18: U$7.P$13 U$19.P$12
RHDP: U1.32 U$7.P$8
RXI: U1.30 U$3.3
TXO: U1.31 U$3.2
VCC: IC3.16

## Tracks (layer width: path | path; a pad name or v marks a point on that pad's centre or on a via)
200V
  Top 0.254: R8.2 65.63,126.28 70.51,126.28 R7.2 70.71,126.28 75.59,126.28 R6.2 75.79,126.28 80.67,126.28 R5.2 80.87,126.28 93.67,126.28 | R29.2 137.97,126.28 133.1,126.28 R30.2 132.89,126.28 109.12,126.28 R21.2 108.92,126.28 104.04,126.28 R22.2 103.83,126.28 98.96,126.28 R23.2 98.75,126.28 93.88,126.28 R24.2 93.67,126.28 | 93.67,126.28 93.67,119.37 91.44,117.13 91.44,113.68 U$9.P$1
+5V  (via drill 0.3)
  Top 0.381: v24.6,19.47 22.47,19.47 LED1.1-VDD | LED2.1-VDD 50.67,19.47 50.41,19.74 v49.61,19.74 47.74,19.74 45.87,21.6 44.01,21.6 42.67,22.94 v40.8,22.94 | v76.01,19.47 79.21,19.47 LED3.1-VDD | v106.15,25.07 106.15,22.4 107.75,20.8 107.75,19.47 LED4.1-VDD 107.75,19.2 107.48,18.94 v107.48,18.14 | v101.61,29.6 101.61,33.87 96.55,38.94 U$2.P$1 | v134.68,17.6 136.28,19.2 LED5.1-VDD | v161.35,18.94 161.62,19.2 164.82,19.2 LED6.1-VDD | v192.29,18.4 193.09,19.2 LED7.1-VDD | v218.96,19.2 221.63,19.2 LED8.1-VDD
  Bottom 0.381: v24.6,19.47 25.14,20 49.34,20 v49.61,19.74 49.61,20 71.48,20 72.01,19.47 v76.01,19.47 | v101.61,29.6 v106.15,25.07 | v107.48,18.14 109.35,18.14 110.41,17.07 112.01,17.07 112.55,17.6 v134.68,17.6 138.42,17.6 138.95,17.07 157.62,17.07 159.49,18.94 v161.35,18.94 162.69,17.6 166.95,17.6 167.49,17.07 185.09,17.07 186.42,18.4 v192.29,18.4 194.69,18.4 196.02,17.07 213.63,17.07 215.76,19.2 v218.96,19.2 | v40.8,22.94 40.8,23.47 42.94,25.6 44.01,25.6 45.34,24.27 50.67,24.27 65.34,38.94 96.28,38.94 U$2.P$1
+5V1  (via drill 0.3)
  Top 0.254: U$21.P$1 101.4,113.68 108.92,113.68 120.29,125.06 139.19,125.06 139.4,125.26 139.4,145.58 138.18,146.8 R25.1 137.97,147 133.1,147 R26.1 132.89,147 128.02,147 R27.1 127.81,147 122.94,147 R28.1 122.73,146.8 109.12,146.8 R17.1 108.92,147 104.04,147 R18.1 103.83,147 98.96,147 R19.1 98.75,147 93.88,147 R20.1 93.67,147 80.87,147 R1.1 80.67,147 75.79,147 R2.1 75.59,147 70.71,147 R3.1 70.51,147 65.63,147 R4.1 65.43,147 64.01,148.43 41.45,148.43 R9.2 41.25,148.43 40.64,148.43 37.8,145.58 30.28,145.58 29.46,144.77 23.57,144.77 | v32.72,127.29 32.72,127.7 | 32.72,127.7 32.72,130.14 IC2.6 | 10.97,133.8 11.18,133.59 11.99,133.59 U1.6 12.19,133.39 12.8,133.39 13.41,132.78 20.32,132.78 U1.18 | 10.97,133.8 10.97,134.81 11.18,135.01 11.99,135.01 U1.4 | R10.2 11.79,144.57 11.79,145.99 8.74,147.85 7.72,147.85 5.69,146.22 5.69,128.11 8.53,125.26 C1.+ 8.74,125.06 13.01,120.79 13.01,113.68 U$8.1 | v10.77,133.59 10.97,133.8 | v27.64,127.7 32.72,127.7 | 23.57,139.08 23.57,144.77 | 23.57,144.77 23.57,146.6 U$3.4 | 23.57,139.08 26.21,136.44 IC2.16 | 23.57,139.08 v19.91,139.08
  Bottom 0.254: v32.72,127.29 32.72,126.07 35.97,122.82 IC1.5 | 10.77,130.75 10.77,127.29 8.74,125.26 C1.+ | 10.77,130.75 v10.77,133.59 | v27.64,127.7 23.37,127.7 20.32,130.75 18.29,130.75 | 10.77,130.75 18.29,130.75 | 18.29,130.75 18.29,137.45 v19.91,139.08
ANODE0
  Top 0.254: IC2.15 27.64,136.44 27.64,137.05 35.76,145.18 77.01,145.18 78.23,143.96 78.23,140.5 U$5.P$2
ANODE1
  Top 0.254: IC2.14 28.85,136.23 28.85,135.83 30.07,134.61 67.46,134.61 73.15,140.3 U$5.P$4
ANODE2
  Top 0.254: IC2.13 30.07,136.44 30.07,137.05 34.34,141.31 63.6,141.31 64.62,140.3 64.62,140.09 65.23,139.49 67.26,139.49 68.07,140.3 U$5.P$6
ANODE3
  Top 0.254: IC2.12 31.5,136.44 31.5,137.25 34.54,140.3 62.99,140.3 U$5.P$8
ANODE4  (via drill 0.3)
  Top 0.254: v67.46,137.66 66.85,138.27 63.8,138.27 62.38,139.69 36.58,139.69 33.93,137.05 33.93,136.44 IC2.10
  Bottom 0.254: v67.46,137.66 103.63,137.66 106.27,140.3 U$6.P$2
ANODE5  (via drill 0.3)
  Top 0.254: v70.71,138.88 66.85,135.01 33.33,135.01 32.72,135.62 32.72,136.23 IC2.11
  Bottom 0.254: v70.71,138.88 99.77,138.88 101.19,140.3 U$6.P$4
ANODE6  (via drill 0.3)
  Top 0.254: v37.39,136.44 35.15,136.44 IC2.9
  Bottom 0.254: v37.39,136.44 64.21,136.44 67.26,139.49 95.3,139.49 96.11,140.3 U$6.P$6
ANODE7  (via drill 0.3)
  Top 0.254: v34.54,131.76 33.93,131.15 33.93,130.34 IC2.7
  Bottom 0.254: v34.54,131.76 60.15,131.76 66.65,138.27 100.58,138.27 102.41,140.09 102.41,140.71 101.8,141.31 92.05,141.31 91.24,140.5 U$6.P$8
ANODE8  (via drill 0.3)
  Top 0.254: v59.33,139.08 41.66,139.08 39.62,137.05 39.62,136.44 IC3.15
  Bottom 0.254: v59.33,139.08 59.74,139.08 68.68,148.02 128.02,148.02 135.53,140.5 U$7.P$2
ANODE9
  Top 0.254: IC3.14 40.84,136.44 40.84,137.05 41.66,137.86 66.24,137.86 67.06,137.05 67.87,137.05 70.31,139.49 71.12,139.49 72.34,140.71 72.34,140.91 72.75,141.31 73.76,141.31 74.78,140.3 74.78,140.09 75.39,139.49 129.64,139.49 130.45,140.3 U$7.P$4
DOT0  (via drill 0.3)
  Top 0.381: N8.LHDP 216.56,26.4 196.29,26.4 195.22,25.34 191.22,25.34 190.16,26.4 188.29,26.4 N7.LHDP 188.02,26.67 166.69,26.67 165.09,28.27 161.35,28.27 159.75,26.67 N6.LHDP 159.49,26.67 157.89,28.27 v133.35,28.27 133.35,37.6 132.02,38.94 130.95,38.94 130.15,39.74 130.15,40.8 129.35,41.6 123.48,41.6 122.42,40.54 122.42,39.74 121.61,38.94 120.81,38.94 120.02,38.14 120.02,37.34 119.22,36.54 v113.08,36.54 | U$1.P$3 110.95,40.01 109.88,38.94 108.01,38.94 102.68,33.6 102.68,26.67 N4.LHDP 102.41,26.67 81.34,26.67 80.28,27.74 79.48,27.74 77.88,26.14 74.41,26.14 74.14,26.4 N3.LHDP 73.88,26.67 72.01,26.67 70.41,28.27 47.47,28.27 45.87,26.67 N2.LHDP 45.61,26.4 25.4,26.4 24.34,25.34 20.34,25.34 19.27,26.4 17.14,26.4 N1.LHDP
  Bottom 0.381: v133.35,28.27 131.75,26.67 131.22,26.67 N5.LHDP | v113.08,36.54 112.28,37.34 112.28,38.94 111.21,40.01 U$1.P$3
DOT1  (via drill 0.3)
  Top 0.381: N5.RHDP 137.08,26.4 158.15,26.4 159.22,25.34 164.29,25.34 165.35,26.4 N6.RHDP | N3.RHDP 79.74,26.4 78.94,26.4 77.88,25.34 72.54,25.34 71.48,26.4 51.47,26.4 N2.RHDP | v81.34,28 93.61,40.27 108.55,40.27 U$1.P$1 | v121.61,28.27 113.35,28.27 v112.01,29.6
  Bottom 0.381: N8.RHDP 222.16,26.4 221.09,25.34 216.29,25.34 215.23,26.4 193.89,26.4 N7.RHDP 193.62,26.4 192.56,25.34 187.76,25.34 186.69,26.4 165.62,26.4 N6.RHDP | 108.28,29.6 108.28,36.27 107.21,37.34 107.21,38.67 108.55,40.01 U$1.P$1 | 108.28,29.6 108.28,26.67 N4.RHDP | N1.RHDP 23,26.4 44.01,26.4 45.61,24.8 49.61,24.8 51.21,26.4 N2.RHDP | v81.34,28 80.01,26.67 N3.RHDP | v121.61,28.27 126.42,23.47 131.75,23.47 134.68,26.4 136.82,26.4 N5.RHDP | 108.28,29.6 v112.01,29.6
DOT2  (via drill 0.3)
  Top 0.254: U$10.P$8 74.17,93.16 75.18,92.14 75.18,85.43 74.17,84.42 74.17,83.4 U$11.P$8 73.97,83.2 73.97,76.29 72.95,75.27 72.95,73.45 73.97,72.43 U$12.P$8 74.17,72.23 74.17,71.82 76,69.99 80.87,69.99 87.17,76.29 v101.19,76.29 | v73.97,65.93 72.95,64.91 72.95,62.27 73.97,61.25 73.97,60.24 U$13.P$8 | U$18.P$8 128.02,93.16 129.24,91.94 129.24,85.43 128.02,84.22 128.02,83.4 U$19.P$8 127.81,83.2 127,83.2 114,70.19 102.21,70.19 | 102.21,70.19 102.21,62.47 101.19,61.46 101.19,60.24 U$17.P$8 | 102.21,70.19 101.19,71.21 U$16.P$8
  Bottom 0.254: v73.97,65.93 73.97,72.23 U$12.P$8 | U$7.P$12 129.24,132.78 130.25,133.8 135.94,133.8 136.75,132.98 136.75,117.54 136.96,117.34 136.96,115.31 135.94,114.29 U$24.P$18 135.94,114.09 135.94,97.02 136.75,96.2 136.75,88.48 134.31,86.04 134.31,83 133.5,82.18 129.03,82.18 128.02,83.2 U$19.P$8 | U$14.P$8 101.19,93.16 101.6,92.75 101.6,87.87 99.77,86.04 99.77,85.43 100.99,84.22 100.99,83.4 U$15.P$8 101.19,83.2 v101.19,76.29 101.19,75.07 102.21,74.06 102.21,72.43 101.19,71.41 U$16.P$8
DOT3
  Top 0.254: U$13.P$10 76.61,60.03 76.61,59.63 79.05,57.19 100.58,57.19 103.43,60.03 U$17.P$10 103.63,60.03 104.65,60.03 105.66,59.02 106.48,59.02 107.49,60.03 107.49,60.64 108.51,61.66 109.12,61.66 130.66,83.2 | 75.39,80.15 75.39,82.18 76.4,83.2 U$11.P$10 76.61,83.4 77.62,84.42 77.62,86.25 76.61,87.26 76.61,93.16 U$10.P$10 | 75.39,80.15 75.39,74.26 76.4,73.24 76.4,72.43 U$12.P$10 | 75.39,80.15 100.79,80.15 103.43,82.79 103.43,83.2 U$15.P$10 | U$18.P$10 130.66,93.16 131.67,92.14 131.67,85.43 130.66,84.42 130.66,83.4 U$19.P$10 130.66,83.2 | 130.66,83.2 131.47,83.2 132.49,82.18 136.14,82.18 138.38,84.42 138.38,114.09 U$24.P$20
  Bottom 0.254: U$16.P$10 103.63,71.21 103.63,64.3 104.65,63.29 104.65,61.86 103.63,60.85 103.63,60.24 U$17.P$10 103.43,60.03 102.41,60.03 101.4,59.02 91.03,59.02 84.33,65.72 79.45,65.72 77.01,68.16 77.01,71.82 76.61,72.23 U$12.P$10 | U$15.P$10 103.63,83.4 103.63,84.22 104.65,85.23 104.65,92.14 103.63,93.16 U$14.P$10 | U$7.P$10 124.16,132.78 125.58,134.2 136.14,134.2 137.16,133.19 137.16,119.57 139.6,117.13 139.6,115.31 138.58,114.29 U$24.P$20
GND  (via drill 0.3)
  Top 0.381: 165.75,18.27 165.89,18.4 165.89,20.27 164.55,21.6 161.09,21.6 160.29,22.4 LED6.3-GND | 165.75,18.27 165.62,18.14 159.22,18.14 158.69,17.6 156.29,17.6 153.89,20 138.15,20 137.62,20.54 136.55,20.54 134.68,22.4 131.75,22.4 LED5.3-GND 131.48,22.4 v129.62,20.54 | 189.76,18.54 188.82,17.6 167.75,17.6 167.22,18.14 165.89,18.14 165.75,18.27 | 189.76,18.54 189.89,18.67 189.89,20 188.82,21.07 188.82,22.4 LED7.3-GND | 189.76,18.54 190.69,17.6 192.56,17.6 193.09,18.14 195.76,18.14 196.29,17.6 217.36,17.6 218.16,18.4 218.16,20.27 217.36,21.07 217.36,22.4 LED8.3-GND | v21.14,22.67 17.67,22.67 LED1.3-GND | v40.01,23.74 42.67,23.74 43.74,22.67 46.14,22.67 LED2.3-GND 46.41,22.67 49.07,22.67 50.41,24 v51.47,24 | v76.81,22.67 74.68,22.67 LED3.3-GND | v103.21,23.74 103.21,22.67 LED4.3-GND 102.95,22.4 v104.81,20.54 | v100.81,36.01 100.81,37.34 99.21,38.94 U$2.P$2
  Bottom 0.381: v21.14,22.67 25.4,22.67 26.47,23.74 v40.01,23.74 | U$2.P$2 98.95,38.94 97.88,37.87 93.88,37.87 78.68,22.67 v76.81,22.67 76.28,22.67 72.81,26.14 53.61,26.14 v51.47,24 | v103.21,23.74 103.21,24.27 100.81,26.67 v100.81,36.01 | v129.62,20.54 129.08,20.54 128.55,20 117.35,20 115.48,18.14 112.28,18.14 111.75,17.6 110.68,17.6 107.75,20.54 v104.81,20.54
GND1  (via drill 0.3)
  Top 0.254: U$7.P$9 121.51,132.78 122.53,133.8 124.36,133.8 125.37,132.78 U$7.P$11 | v119.48,125.67 110.74,125.67 98.75,113.68 U$21.P$2 | 42.88,130.34 43.08,130.34 IC3.5 | 42.88,130.34 42.06,130.34 IC3.4 42.06,130.14 v42.06,128.72 | 42.88,130.34 44.09,131.56 46.33,131.56 46.94,130.95 46.94,130.34 IC3.8 47.14,130.14 52.43,130.14 62.38,120.18 78.23,120.18 84.73,113.68 88.59,113.68 U$9.P$2 | IC2.5 31.5,130.34 31.5,130.95 32.92,132.37 34.95,132.37 35.15,132.17 35.15,130.34 IC2.8 34.95,130.14 34.95,129.33 v34.34,128.72 | U$8.3 9.96,108.8 9.96,110.63 7.11,113.48 U$8.2 6.91,113.68 3.66,116.93 3.66,125.06 C1.- | 13.21,135.01 13.21,135.42 12.8,135.83 12.19,135.83 U1.3 | 13.21,135.01 13.21,134.81 12.8,134.41 12.19,134.41 U1.5 | 13.21,135.01 20.32,135.01 U1.21 | 11.99,136.03 U1.3 | 24.59,145.78 24.79,145.58 29.67,145.58 32.51,148.43 LED9.C | 24.59,145.78 24.38,145.99 24.38,146.6 U$3.5 | U$4.4 8.74,134 7.11,132.37 7.11,131.97 U$4.2 7.11,131.76 7.11,130.95 v7.32,130.75 | 8.74,134.2 U$4.4 | 11.99,135.83 U1.3 | v24.18,145.38 24.59,145.78 | U$4.4 10.36,135.86 U1.3
  Bottom 0.254: U$9.P$2 88.8,113.68 89.81,113.68 90.83,114.69 97.54,114.69 98.55,113.68 U$21.P$2 | v119.48,125.67 120.29,126.48 120.29,132.78 U$7.P$9 | 3.66,125.26 3.62,125.22 | 3.62,125.22 C1.- | RESET.2 RESET.1 3.66,130.75 | 3.66,130.75 3.66,125.27 3.62,125.22 | 3.66,130.75 v7.32,130.75 7.32,131.15 13.21,137.05 | 3.66,130.75 | 37.19,125.87 37.19,121.6 36.17,120.59 36.17,115.1 IC1.12 | 37.19,125.87 v34.34,128.72 33.73,128.11 28.85,128.11 20.52,136.44 20.52,139.49 20.32,139.69 19.51,139.69 18.49,138.67 14.83,138.67 13.21,137.05 | v24.18,145.38 17.48,145.38 11.58,139.49 11.58,138.67 13.21,137.05 | 37.19,125.87 39.22,125.87 v42.06,128.72
LHDP  (via drill 0.3)
  Top 0.254: v12.19,139.08 12.19,137.66 U1.1
  Bottom 0.254: v12.19,139.08 15.24,139.08 17.48,141.31 56.08,141.31 58.93,138.47 59.74,138.47 62.99,141.72 117.65,141.72 119.89,139.49 124.56,139.49 125.37,140.3 U$7.P$6
N$1
  Top 0.381: LED2.4-DIN 46.14,19.47 43.74,19.47 42.67,20.54 24.34,20.54 22.47,22.4 LED1.2-DOUT
N$2
  Top 0.381: LED3.4-DIN 74.41,19.47 72.01,19.47 71.48,20 53.34,20 50.94,22.4 LED2.2-DOUT
N$3
  Top 0.381: LED3.2-DOUT 79.48,22.4 80.81,22.4 85.61,17.6 100.01,17.6 101.61,19.2 102.95,19.2 LED4.4-DIN
N$4
  Top 0.381: LED4.2-DOUT 108.01,22.67 108.01,23.47 110.15,25.6 117.08,25.6 122.68,20 129.08,20 129.62,19.47 131.48,19.47 LED5.4-DIN
N$5
  Top 0.381: LED6.4-DIN 160.02,19.47 157.62,19.47 156.55,20.54 138.42,20.54 136.55,22.4 LED5.2-DOUT
N$6
  Top 0.381: LED7.4-DIN 188.56,19.47 186.16,19.47 185.09,20.54 172.82,20.54 170.42,22.94 165.35,22.94 165.09,22.67 LED6.2-DOUT
N$7
  Top 0.381: LED8.4-DIN 217.09,19.47 214.69,19.47 213.63,20.54 195.22,20.54 193.36,22.4 LED7.2-DOUT
N$8  (via drill 0.3)
  Top 0.381: v90.14,40.27 30.14,40.27 29.14,40.27 12.6,23.74 12.6,21.34 13.4,20.54 13.94,20.54 15,19.47 17.4,19.47 LED1.4-DIN
  Bottom 0.381: v90.14,40.27 100.28,40.27 101.35,39.2 U$2.P$3
N$9
  Top 0.254: U$4.3 8.74,131.97 10.57,131.97 11.18,132.58 11.99,132.58 U1.7
N$10
  Top 0.254: U$4.1 6.91,134 6.91,133.59 6.1,132.78 6.1,130.95 6.91,130.14 10.36,130.14 11.99,131.76 U1.8
N$11  (via drill 0.3)
  Top 0.254: v15.04,127.29 15.04,130.34 U1.11 | v51,120.79 43.08,120.79 41.25,122.62 IC1.3
  Bottom 0.254: v15.04,127.29 13.61,125.87 13.61,122.21 19.1,116.73 33.93,116.73 35.15,115.51 35.15,113.88 35.56,113.48 36.58,113.48 37.59,114.49 37.59,119.17 41.05,122.62 IC1.3 | v51,120.79 62.38,120.79 66.65,116.52 67.67,116.52 U$20.P$5
N$12  (via drill 0.3)
  Top 0.254: v14.22,125.47 14.22,130.34 U1.10 | v48.97,118.76 48.56,118.76 47.95,119.37 36.78,119.37 33.53,122.62 IC1.6
  Bottom 0.254: v14.22,125.47 14.22,122.21 18.69,117.74 32.92,117.74 33.53,118.35 33.53,122.62 IC1.6 | v48.97,118.76 52.43,115.31 68.07,115.31 69.09,116.32 70.1,116.32 U$20.P$6
N$13  (via drill 0.3)
  Top 0.254: U1.9 13.61,130.34 13.61,125.06 v16.05,122.62 26.62,112.05 67.87,112.05 68.89,113.07 68.89,113.68 69.9,114.69 70.1,114.69 71.73,116.32 72.75,116.32 U$20.P$7
  Bottom 0.254: v16.05,122.62 26.42,122.62 28.25,124.45 29.26,124.45 30.89,122.82 IC1.7
N$14  (via drill 0.3)
  Top 0.254: v18.9,135.62 17.88,136.64 12.19,136.64 U1.2 | v23.37,131.15 23.37,129.73 27.84,125.26 36.17,125.26 38.61,122.82 IC1.4 | v47.95,126.68 52.63,126.68 59.74,119.57 71.32,119.57 74.37,116.52 75.18,116.52 U$20.P$8
  Bottom 0.254: v23.37,131.15 v18.9,135.62 | v47.95,126.68 42.67,126.68 38.81,122.82 IC1.4
N$15
  Top 0.254: R1.2 80.87,143.96 80.87,140.5 U$5.P$1
N$16
  Top 0.254: R2.2 75.79,143.96 75.79,140.5 U$5.P$3
N$17
  Top 0.254: R3.2 70.71,143.96 70.71,140.5 U$5.P$5
N$18
  Top 0.254: R4.2 65.63,143.96 65.63,140.5 U$5.P$7
N$19
  Top 0.254: R8.1 65.63,129.12 65.63,132.78 U$5.P$10
N$20
  Top 0.254: R7.1 70.71,129.12 70.71,132.78 U$5.P$12
N$21
  Top 0.254: R6.1 75.79,129.12 75.79,132.78 U$5.P$14
N$22
  Top 0.254: R5.1 80.87,129.12 80.87,132.78 U$5.P$16
N$23
  Top 0.254: R17.2 109.12,143.96 109.12,140.5 U$6.P$1
N$24
  Top 0.254: R18.2 104.04,143.96 104.04,140.5 U$6.P$3
N$25
  Top 0.254: R19.2 98.96,143.96 98.96,140.5 U$6.P$5
N$26
  Top 0.254: R20.2 93.88,143.96 93.88,140.5 U$6.P$7
N$27
  Top 0.254: R24.1 93.88,129.12 93.88,132.78 U$6.P$10
N$28
  Top 0.254: R23.1 98.96,129.12 98.96,132.78 U$6.P$12
N$29
  Top 0.254: R22.1 104.04,129.12 104.04,132.78 U$6.P$14
N$30
  Top 0.254: R21.1 109.12,129.12 109.12,132.78 U$6.P$16
N$31
  Top 0.254: R25.2 138.18,143.96 138.18,140.5 U$7.P$1
N$32
  Top 0.254: R26.2 133.1,143.96 133.1,140.5 U$7.P$3
N$33
  Top 0.254: R27.2 128.02,143.96 128.02,140.5 U$7.P$5
N$34
  Top 0.254: R28.2 122.94,143.96 122.94,140.5 U$7.P$7
N$35
  Top 0.254: R10.1 14.7,142.77 12.91,140.98 | 12.91,140.98 12.91,137.96 13.08,137.79 15.42,137.79 15.66,138.04 15.66,138.74 U1.29 | 12.91,140.98 11.83,140.98 RESET.3
  Bottom 0.254: RESET.3 RESET.4
N$36
  Top 0.254: R9.1 38.41,148.63 35.56,148.63 LED9.A
N$37
  Top 0.254: R30.1 133.1,129.12 133.1,132.78 U$7.P$14
N$38
  Top 0.254: R29.1 138.18,129.12 138.18,132.78 U$7.P$16
N$39  (via drill 0.3)
  Top 0.254: v19.91,130.14 20.32,130.54 20.32,131.76 U1.17 | v14.83,122.62 14.83,121.81 25.6,111.04 77.83,111.04 80.26,113.48 U$22.P$10
  Bottom 0.254: v19.91,130.14 18.9,130.14 14.83,126.07 v14.83,122.62
N$40  (via drill 0.3)
  Top 0.254: v18.9,129.12 18.9,130.34 U1.16 | v19.3,118.35 19.71,118.35 26.62,111.44 75.79,111.44 77.83,113.48 U$22.P$9
  Bottom 0.254: v18.9,129.12 18.9,126.48 15.44,123.03 15.44,122.21 v19.3,118.35
N$41  (via drill 0.3)
  Top 0.254: v48.77,119.57 48.56,119.78 36.98,119.78 35.15,121.6 35.15,123.23 33.93,124.45 22.55,124.45 18.29,128.72 18.29,130.34 U1.15
  Bottom 0.254: v48.77,119.57 62.18,132.98 62.18,133.19 62.79,133.8 63.4,133.8 64.62,132.58 64.62,126.28 74.17,116.73 74.17,114.69 75.18,113.68 U$22.P$8
N$42  (via drill 0.3)
  Top 0.254: v55.47,113.88 55.47,115.1 55.27,115.31 51.41,115.31 47.75,118.96 27.43,118.96 17.48,128.92 17.48,130.34 U1.14 | v71.12,112.05 72.75,113.68 U$22.P$7
  Bottom 0.254: v55.47,113.88 55.47,113.07 56.49,112.05 v71.12,112.05
N$43  (via drill 0.3)
  Top 0.254: v56.29,113.27 27.84,113.27 16.66,124.45 16.66,130.34 U1.13
  Bottom 0.254: v56.29,113.27 57.1,112.46 69.09,112.46 70.1,113.48 U$22.P$6
N$44
  Top 0.254: U1.12 15.85,130.34 15.85,123.84 27.23,112.46 66.65,112.46 67.67,113.48 U$22.P$5
N$45
  Top 0.254: U1.20 20.52,134.2 21.34,134.2 23.98,131.56 23.98,129.73 28.04,125.67 46.74,125.67 47.14,125.26 51.41,125.26 59.13,117.54 60.55,117.54 61.57,116.52 61.57,116.12 64.01,113.68 65.02,113.68 U$22.P$4
N$46  (via drill 0.3)
  Top 0.254: v24.59,130.34 24.59,132.37 21.13,135.83 20.52,135.83 U1.22 | v32.51,118.35 47.75,118.35 51.41,114.69 v54.86,114.69
  Bottom 0.254: v24.59,130.34 26.62,128.31 28.04,128.31 32.51,123.84 v32.51,118.35 | v54.86,114.69 61.57,114.69 62.59,113.68 U$22.P$3
N$47
  Top 0.254: U1.19 20.52,133.39 21.34,133.39 22.76,131.97 22.76,129.73 27.64,124.86 35.97,124.86 37.59,123.23 37.59,121.6 39.01,120.18 52.43,120.18 58.93,113.68 59.94,113.68 U$22.P$2
N$48  (via drill 0.3)
  Top 0.254: v22.96,140.71 17.68,140.71 16.66,139.69 16.66,139.08 U1.28 | v30.07,133.59 58.73,133.59 64.62,127.7 v79.86,127.7
  Bottom 0.254: v30.07,133.59 v22.96,140.71 | v79.86,127.7 79.86,127.29 88.59,118.56 U$23.P$1
N$49  (via drill 0.3)
  Top 0.254: v22.35,140.09 17.88,140.09 17.48,139.69 17.48,139.08 U1.27 | v57.3,132.37 69.09,120.59 89.2,120.59 91.24,118.56 U$23.P$2
  Bottom 0.254: v22.35,140.09 30.07,132.37 v57.3,132.37
N$50
  Bottom 0.254: N9.A 164.1,82.27 164.3,82.48 167.55,82.48 171.62,78.41 171.62,76.18 171.21,75.77 171.21,63.99 170.19,62.97 170.19,61.34 169.08,60.23 U$25.P$12
N$51
  Top 0.254: N9.LHDP 161.25,81.46 163.29,81.46 164.3,80.45 168.57,80.45 168.77,80.65 169.38,80.65 170.19,79.84 170.19,79.23 161.46,70.49 161.46,64.39 162.88,62.97 162.88,61.34 163.9,60.33 163.9,59.94 U$25.P$8
N$52
  Bottom 0.254: N9.RHDP 166.94,81.46 166.94,80.24 169.38,77.8 170.6,77.8 171.21,77.19 171.21,76.38 170.8,75.97 170.8,66.22 167.76,63.17 167.76,61.34 166.54,60.13 U$25.P$10
N$53
  Bottom 0.254: N10.A 190.6,82.27 190.8,82.48 194.05,82.48 198.12,78.41 198.12,76.18 197.71,75.77 197.71,63.99 196.69,62.97 196.69,61.34 195.58,60.23 U$26.P$12
N$54
  Top 0.254: N10.LHDP 187.75,81.46 189.79,81.46 190.8,80.45 195.07,80.45 195.27,80.65 195.88,80.65 196.69,79.84 196.69,79.23 187.96,70.49 187.96,64.39 189.38,62.97 189.38,61.34 190.4,60.33 190.4,59.94 U$26.P$8
N$55
  Bottom 0.254: N10.RHDP 193.44,81.46 193.44,80.24 195.88,77.8 197.1,77.8 197.71,77.19 197.71,76.38 197.3,75.97 197.3,66.22 194.26,63.17 194.26,61.34 193.04,60.13 U$26.P$10
N$56
  Bottom 0.254: N11.A 217.1,82.27 217.3,82.48 220.55,82.48 224.62,78.41 224.62,76.18 224.21,75.77 224.21,63.99 223.19,62.97 223.19,61.34 222.08,60.23 U$27.P$12
N$57
  Top 0.254: N11.LHDP 214.25,81.46 216.29,81.46 217.3,80.45 221.57,80.45 221.77,80.65 222.38,80.65 223.19,79.84 223.19,79.23 214.46,70.49 214.46,64.39 215.88,62.97 215.88,61.34 216.9,60.33 216.9,59.94 U$27.P$8
N$58
  Bottom 0.254: N11.RHDP 219.94,81.46 219.94,80.24 222.38,77.8 223.6,77.8 224.21,77.19 224.21,76.38 223.8,75.97 223.8,66.22 220.76,63.17 220.76,61.34 219.54,60.13 U$27.P$10
N$59
  Bottom 0.254: N12.A 164.1,113.77 164.3,113.98 167.55,113.98 171.62,109.91 171.62,107.68 171.21,107.27 171.21,95.49 170.19,94.47 170.19,92.84 169.08,91.73 U$28.P$12
N$60
  Top 0.254: N12.LHDP 161.25,112.96 163.29,112.96 164.3,111.95 168.57,111.95 168.77,112.15 169.38,112.15 170.19,111.34 170.19,110.73 161.46,101.99 161.46,95.89 162.88,94.47 162.88,92.84 163.9,91.83 163.9,91.44 U$28.P$8
N$61
  Bottom 0.254: N12.RHDP 166.94,112.96 166.94,111.74 169.38,109.3 170.6,109.3 171.21,108.69 171.21,107.88 170.8,107.47 170.8,97.72 167.76,94.67 167.76,92.84 166.54,91.63 U$28.P$10
N$62
  Bottom 0.254: N13.A 190.6,113.77 190.8,113.98 194.05,113.98 198.12,109.91 198.12,107.68 197.71,107.27 197.71,95.49 196.69,94.47 196.69,92.84 195.58,91.73 U$29.P$12
N$63
  Top 0.254: N13.LHDP 187.75,112.96 189.79,112.96 190.8,111.95 195.07,111.95 195.27,112.15 195.88,112.15 196.69,111.34 196.69,110.73 187.96,101.99 187.96,95.89 189.38,94.47 189.38,92.84 190.4,91.83 190.4,91.44 U$29.P$8
N$64
  Bottom 0.254: N13.RHDP 193.44,112.96 193.44,111.74 195.88,109.3 197.1,109.3 197.71,108.69 197.71,107.88 197.3,107.47 197.3,97.72 194.26,94.67 194.26,92.84 193.04,91.63 U$29.P$10
N$65
  Bottom 0.254: N14.A 217.1,113.77 217.3,113.98 220.55,113.98 224.62,109.91 224.62,107.68 224.21,107.27 224.21,95.49 223.19,94.47 223.19,92.84 222.08,91.73 U$30.P$12
N$66
  Top 0.254: N14.LHDP 214.25,112.96 216.29,112.96 217.3,111.95 221.57,111.95 221.77,112.15 222.38,112.15 223.19,111.34 223.19,110.73 214.46,101.99 214.46,95.89 215.88,94.47 215.88,92.84 216.9,91.83 216.9,91.44 U$30.P$8
N$67
  Bottom 0.254: N14.RHDP 219.94,112.96 219.94,111.74 222.38,109.3 223.6,109.3 224.21,108.69 224.21,107.88 223.8,107.47 223.8,97.72 220.76,94.67 220.76,92.84 219.54,91.63 U$30.P$10
N$68
  Bottom 0.254: N15.A 164.1,145.27 164.3,145.48 167.55,145.48 171.62,141.41 171.62,139.18 171.21,138.77 171.21,126.99 170.19,125.97 170.19,124.34 169.08,123.23 U$31.P$12
N$69
  Top 0.254: N15.LHDP 161.25,144.46 163.29,144.46 164.3,143.45 168.57,143.45 168.77,143.65 169.38,143.65 170.19,142.84 170.19,142.23 161.46,133.49 161.46,127.39 162.88,125.97 162.88,124.34 163.9,123.33 163.9,122.94 U$31.P$8
N$70
  Bottom 0.254: N15.RHDP 166.94,144.46 166.94,143.24 169.38,140.8 170.6,140.8 171.21,140.19 171.21,139.38 170.8,138.97 170.8,129.22 167.76,126.17 167.76,124.34 166.54,123.13 U$31.P$10
N$71
  Bottom 0.254: N16.A 190.6,145.27 190.8,145.48 194.05,145.48 198.12,141.41 198.12,139.18 197.71,138.77 197.71,126.99 196.69,125.97 196.69,124.34 195.58,123.23 U$32.P$12
N$72
  Top 0.254: N16.LHDP 187.75,144.46 189.79,144.46 190.8,143.45 195.07,143.45 195.27,143.65 195.88,143.65 196.69,142.84 196.69,142.23 187.96,133.49 187.96,127.39 189.38,125.97 189.38,124.34 190.4,123.33 190.4,122.94 U$32.P$8
N$73
  Bottom 0.254: N16.RHDP 193.44,144.46 193.44,143.24 195.88,140.8 197.1,140.8 197.71,140.19 197.71,139.38 197.3,138.97 197.3,129.22 194.26,126.17 194.26,124.34 193.04,123.13 U$32.P$10
N$74
  Bottom 0.254: N17.A 217.1,145.27 217.3,145.48 220.55,145.48 224.62,141.41 224.62,139.18 224.21,138.77 224.21,126.99 223.19,125.97 223.19,124.34 222.08,123.23 U$33.P$12
N$75
  Top 0.254: N17.LHDP 214.25,144.46 216.29,144.46 217.3,143.45 221.57,143.45 221.77,143.65 222.38,143.65 223.19,142.84 223.19,142.23 214.46,133.49 214.46,127.39 215.88,125.97 215.88,124.34 216.9,123.33 216.9,122.94 U$33.P$8
N$76
  Bottom 0.254: N17.RHDP 219.94,144.46 219.94,143.24 222.38,140.8 223.6,140.8 224.21,140.19 224.21,139.38 223.8,138.97 223.8,129.22 220.76,126.17 220.76,124.34 219.54,123.13 U$33.P$10
N$77
  Bottom 0.254: U$34.P$1 239.53,75.53 239.53,81.22 238.52,82.24 SW1.1 238.52,82.44 238.52,94.63 SW1.2
N$78
  Bottom 0.254: U$34.P$2 242.38,75.53 242.38,81.22 243.4,82.24 SW1.3 243.6,82.44 243.6,94.63 SW1.4
N$79
  Bottom 0.254: U$35.P$1 261.03,75.53 261.03,81.22 260.02,82.24 SW2.1 260.02,82.44 260.02,94.63 SW2.2
N$80
  Bottom 0.254: U$35.P$2 263.88,75.53 263.88,81.22 264.89,82.24 SW2.3 265.1,82.44 265.1,94.63 SW2.4
N$81
  Bottom 0.254: U$36.P$1 239.53,102.03 239.53,107.72 238.52,108.74 SW3.1 238.52,108.94 238.52,121.13 SW3.2
N$82
  Bottom 0.254: U$36.P$2 242.38,102.03 242.38,107.72 243.4,108.74 SW3.3 243.6,108.94 243.6,121.13 SW3.4
N$83
  Bottom 0.254: U$37.P$1 261.03,102.03 261.03,107.72 260.02,108.74 SW4.1 260.02,108.94 260.02,121.13 SW4.2
N$84
  Bottom 0.254: U$37.P$2 263.88,102.03 263.88,107.72 264.89,108.74 SW4.3 265.1,108.94 265.1,121.13 SW4.4
N$85
  Bottom 0.254: U$38.P$1 239.53,128.53 239.53,134.22 238.52,135.24 SW5.1 238.52,135.44 238.52,147.63 SW5.2
N$86
  Bottom 0.254: U$38.P$2 242.38,128.53 242.38,134.22 243.4,135.24 SW5.3 243.6,135.44 243.6,147.63 SW5.4
N$87
  Bottom 0.254: U$39.P$1 261.03,128.53 261.03,134.22 260.02,135.24 SW6.1 260.02,135.44 260.02,147.63 SW6.2
N$88
  Bottom 0.254: U$39.P$2 263.88,128.53 263.88,134.22 264.89,135.24 SW6.3 265.1,135.44 265.1,147.63 SW6.4
N$89
  Bottom 0.254: U$40.P$1 282.53,75.53 282.53,81.22 281.52,82.24 SW7.1 281.52,82.44 281.52,94.63 SW7.2
N$90
  Bottom 0.254: U$40.P$2 285.38,75.53 285.38,81.22 286.39,82.24 SW7.3 286.6,82.44 286.6,94.63 SW7.4
N$91
  Bottom 0.254: U$41.P$1 282.53,102.03 282.53,107.72 281.52,108.74 SW8.1 281.52,108.94 281.52,121.13 SW8.2
N$92
  Bottom 0.254: U$41.P$2 285.38,102.03 285.38,107.72 286.39,108.74 SW8.3 286.6,108.94 286.6,121.13 SW8.4
N$93
  Bottom 0.254: U$42.P$1 282.53,128.53 282.53,134.22 281.52,135.24 SW9.1 281.52,135.44 281.52,147.63 SW9.2
N$94
  Bottom 0.254: U$42.P$2 285.38,128.53 285.38,134.22 286.39,135.24 SW9.3 286.6,135.44 286.6,147.63 SW9.4
N$95
  Top 0.254: N18.A 260.19,17.48 260.19,15.44 260.6,15.04 260.6,4.47 260.19,4.06 260.19,2.44 259.18,1.42 U$43.P$12
N$96
  Bottom 0.254: N18.LHDP 259.58,20.32 259.58,19.51 261.21,17.88 261.21,5.89 262.84,4.27 262.84,3.45 261.82,2.44 255.11,2.44 254.1,1.42 U$43.P$8
N$97
  Top 0.254: N18.RHDP 259.38,14.43 259.38,5.89 257.76,4.27 257.76,2.44 256.74,1.42 U$43.P$10
N$98
  Top 0.254: N19.A 286.69,17.48 286.69,15.44 287.1,15.04 287.1,4.47 286.69,4.06 286.69,2.44 285.68,1.42 U$44.P$12
N$99
  Bottom 0.254: N19.LHDP 286.08,20.32 286.08,19.51 287.71,17.88 287.71,5.89 289.34,4.27 289.34,3.45 288.32,2.44 281.61,2.44 280.6,1.42 U$44.P$8
N$100
  Top 0.254: N19.RHDP 285.88,14.43 285.88,5.89 284.26,4.27 284.26,2.44 283.24,1.42 U$44.P$10
N$101
  Top 0.254: N20.A 260.19,48.98 260.19,46.94 260.6,46.54 260.6,35.97 260.19,35.56 260.19,33.94 259.18,32.92 U$45.P$12
N$102
  Bottom 0.254: N20.LHDP 259.58,51.82 259.58,51.01 261.21,49.38 261.21,37.39 262.84,35.77 262.84,34.95 261.82,33.94 255.11,33.94 254.1,32.92 U$45.P$8
N$103
  Top 0.254: N20.RHDP 259.38,45.93 259.38,37.39 257.76,35.77 257.76,33.94 256.74,32.92 U$45.P$10
N$104
  Top 0.254: N21.A 286.69,48.98 286.69,46.94 287.1,46.54 287.1,35.97 286.69,35.56 286.69,33.94 285.68,32.92 U$46.P$12
N$105
  Bottom 0.254: N21.LHDP 286.08,51.82 286.08,51.01 287.71,49.38 287.71,37.39 289.34,35.77 289.34,34.95 288.32,33.94 281.61,33.94 280.6,32.92 U$46.P$8
N$106
  Top 0.254: N21.RHDP 285.88,45.93 285.88,37.39 284.26,35.77 284.26,33.94 283.24,32.92 U$46.P$10
NIX1  (via drill 0.3)
  Top 0.254: v19.1,136.84 18.29,137.66 18.29,138.88 U1.26 | v25.4,130.54 26.01,130.54 26.21,130.34 IC2.1 26.42,130.14 26.42,127.9 27.64,126.68 33.33,126.68 36.78,130.14 37.8,130.14 | 37.8,130.14 38,130.14 IC3.1 | v57.51,120.18 57.1,120.18 51.61,125.67 47.35,125.67 45.31,127.7 40.23,127.7 37.8,130.14
  Bottom 0.254: v25.4,130.54 v19.1,136.84 | v57.51,120.18 57.51,116.52 U$20.P$1
NIX2  (via drill 0.3)
  Top 0.254: v21.13,138.27 19.71,138.27 19.1,138.88 U1.25 | v26.82,131.76 27.43,131.15 27.43,130.34 IC2.2 27.64,130.14 27.64,129.33 28.85,128.11 29.67,128.11 30.68,129.12 30.68,131.56 31.9,132.78 37.59,132.78 39.42,130.95 39.42,130.34 IC3.2 | v51,124.65 59.13,116.52 59.94,116.52 U$20.P$2
  Bottom 0.254: v21.13,138.27 21.13,137.86 26.82,132.17 v26.82,131.76 27.43,131.15 44.5,131.15 v51,124.65
NIX3
  Top 0.254: 28.65,130.95 22.15,137.45 20.52,137.45 U1.24 | 28.65,130.95 28.65,130.34 IC2.3 28.65,130.95 | 28.65,130.95 30.89,133.19 38.41,133.19 40.64,130.95 40.64,130.34 IC3.3 40.84,130.14 40.84,128.92 41.66,128.11 45.52,128.11 47.55,126.07 52.63,126.07 62.18,116.52 62.59,116.52 U$20.P$3
NIX4  (via drill 0.3)
  Top 0.254: v26.01,131.97 21.34,136.64 20.52,136.64 U1.23 | v29.26,128.72 29.87,129.33 29.87,130.14 IC2.4 | 44.5,129.53 44.5,130.14 IC3.6 44.5,129.53 | v43.69,128.72 44.5,129.53 | v61.37,120.18 59.74,120.18 51,128.92 45.11,128.92 44.5,129.53
  Bottom 0.254: v26.01,131.97 26.01,131.56 28.85,128.72 v29.26,128.72 29.87,129.33 42.47,129.33 43.08,128.72 v43.69,128.72 | v61.37,120.18 65.02,116.52 U$20.P$4
NIXIE0
  Top 0.381: N1.0 15,24.27 23.8,24.27 24.6,23.47 38.67,23.47 39.74,24.54 43.2,24.54 N2.0 | N4.0 100.28,24.54 83.74,24.54 82.68,25.6 80.54,25.6 79.48,24.54 72.01,24.54 N3.0